# Altium PCB Controller R2.PcbDoc (part 3 of 3)
Units mil, origin at the board's own origin, x right, y up, seen from the top; angles counter-clockwise.
Board outline 3149.61 x 3149.61 mil, 4 copper layers (Top Layer, Inner 1, Inner 2, Bottom Layer), stack 70.112 mil thick; 128 components, 120 nets, 594 pads, 1557 vias.
Unrouted connection lines stored in the file: 130.
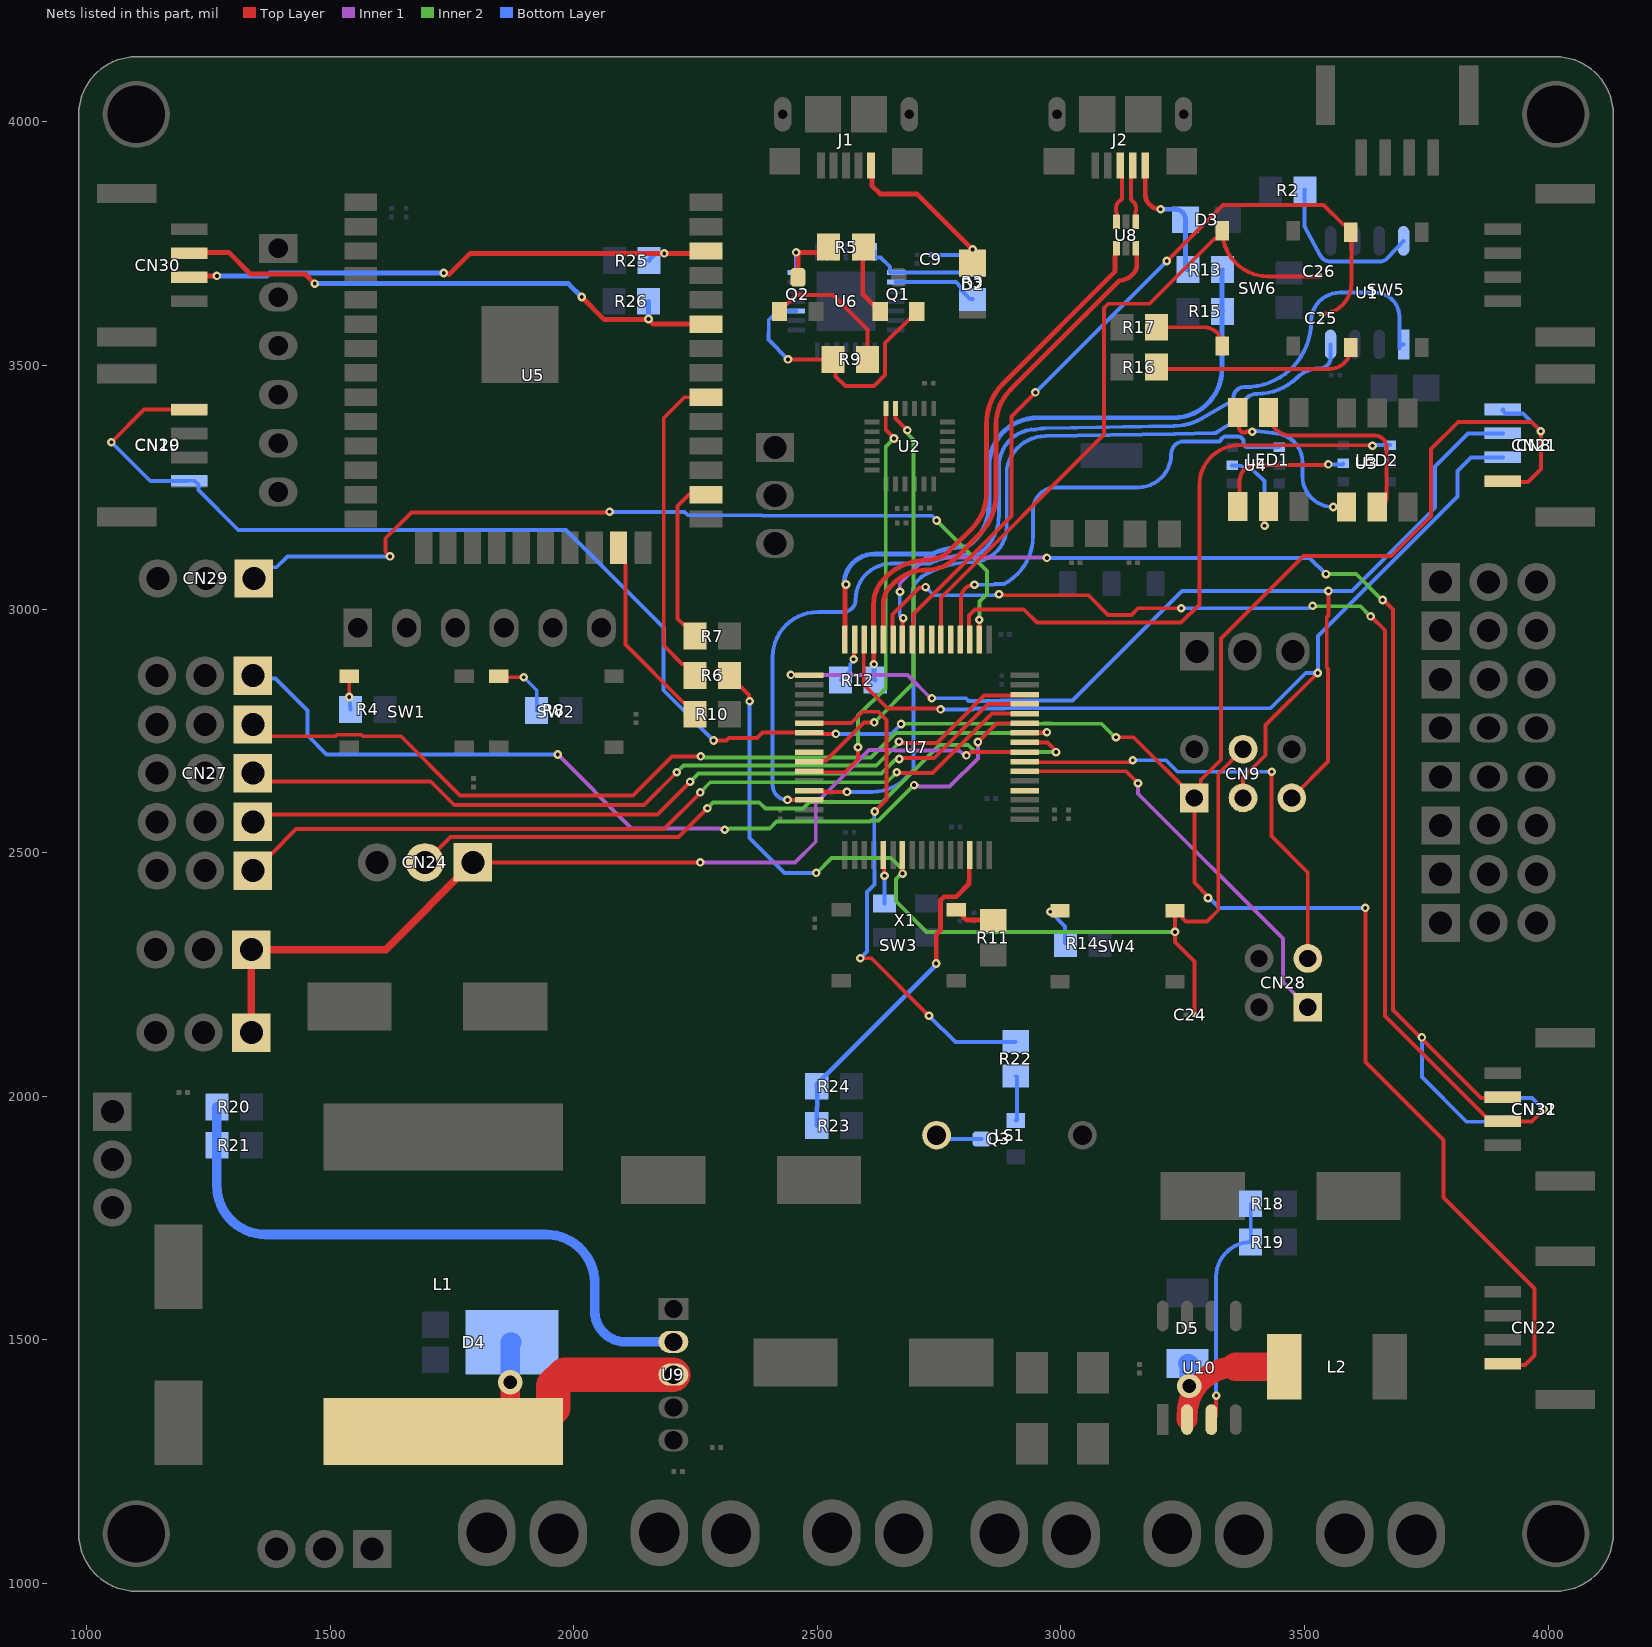
[diagram p5: the nets of this part, all layers, seen from the top]

## Via types
v1: diameter 17.72/17.72/17.72/17.72 (per signal layer), hole 7.87, Top Layer to Bottom Layer, tented both sides, 1234 vias
v2: diameter 17.72, hole 7.87, Top Layer to Bottom Layer, tented both sides, 176 vias
v3: diameter 10.87, hole 7.87, Top Layer to Bottom Layer, 138 vias
v4: diameter 10.87, hole 7.87, Top Layer to Bottom Layer, tented both sides, 6 vias
v5: diameter 50, hole 28, Top Layer to Bottom Layer, tented both sides, 2 vias
v6: diameter 78.74, hole 39.37, Top Layer to Bottom Layer, tented both sides, 1 vias

## Nets (pads, with @x,y where several pads share a name; then routed paths per layer and width w, separated by ;. In a path a pad name is that pad's centre, name@x,y a point inside that pad or via, vN(x,y) a via of type N, cw(c..) or ccw(c..) an arc to the next point about the centre after c; other vN are vias at no path point) (continued)
NetCN24_1: CN24.1 pad.1@1338.58,2130.91 pad.1@1338.58,2301.18 U7.24 | length 1980.4
  Top Layer w8: CN24.1@1793.31,2480.32 v2(2259.84,2480.32) ; v2(2806.1,2699.8) 2808.73,2699.8 2815.46,2706.54 U7.24@2925.72,2706.54
  Top Layer w15.75: pad.1@1338.58,2130.91 pad.1@1338.58,2301.18 1614.17,2301.18 CN24.1@1793.31,2480.32
  Inner 1 w8: v2(2259.84,2480.32) 2454.72,2480.32 2497.05,2522.64 2497.05,2601.38 2606.3,2710.63 2659.93,2710.63 2660.32,2710.23 2791.03,2710.23 2797.03,2704.23 2799.04,2704.23 2803.47,2699.8 v2(2806.1,2699.8)
NetCN24_2: CN24.2 U7.25 | length 1492.4
  Top Layer w8: CN24.2@1694.88,2480.32 1747.05,2532.48 2215.55,2532.48 v2(2274.61,2591.54) ; U7.25@2925.72,2726.54 2925.88,2726.38 2972.44,2726.38 2990.16,2708.66 v2(2990.16,2706.69)
  Inner 2 w8: CN24.2@1688.98,2478.35 1690.94,2480.32 CN24.2@1694.88,2480.32 ; v2(2274.61,2591.54) 2286.42,2603.35 2380.91,2603.35 2393.7,2590.55 2470.47,2590.55 2484.25,2604.33 2633.86,2604.33 2750.98,2721.46 2810.04,2721.46 2824.8,2706.69 v2(2990.16,2706.69)
NetCN27_1: CN27.1 U7.27 | length 1857.8
  Top Layer w8: v2(2829.73,2727.39) 2868.08,2765.75 2925.2,2765.75 2925.41,2765.54 U7.27@2925.72,2765.54
  Inner 1 w8: v2(1967.52,2701.77) 2119.09,2550.2 2300.49,2550.2 2301.67,2549.02 2308.18,2549.02 v2(2310.04,2547.17) ; v2(2698.82,2638.78) 2700.68,2636.92 2707.27,2636.92 2708.36,2635.83 2771.65,2635.83 2829.72,2693.9 v2@2829.72,2726.38 ; v2@2829.73,2726.38 v2(2829.73,2727.39)
  Inner 2 w8: v2(2310.04,2547.17) 2311.9,2549.02 2318.41,2549.02 2319.58,2550.2 2402.56,2550.2 2416.34,2563.98 2608.27,2563.98 2610.24,2565.94 2625.98,2565.94 v2(2698.82,2638.78)
  Bottom Layer w8: CN27.1@1341.54,2863.39 1347.08,2857.84 1388.22,2857.84 1453.74,2792.32 1453.74,2741.14 1493.11,2701.77 v2(1967.52,2701.77)
NetCN27_2: CN27.2 U7.26 | length 1794
  Top Layer w8: CN27.2@1341.54,2763.39 1342.91,2763.39 1367.13,2739.17 1511.57,2739.17 1514.71,2742.32 1564.03,2742.32 1567.17,2739.17 1645.67,2739.17 1766.92,2617.92 2121.86,2617.92 2201.77,2697.83 v2(2260.83,2697.83) ; U7.26@2925.72,2746.54 2926.07,2746.89 2971.11,2746.89 v2(2971.46,2747.24)
  Inner 2 w8: v2(2260.83,2697.83) 2262.69,2695.98 2269.56,2695.98 2269.67,2695.87 2610.24,2695.87 2660.43,2746.06 2970.28,2746.06 v2(2971.46,2747.24)
NetCN27_3: CN27.3 U7.30 | length 1708.9
  Top Layer w8: CN27.3@1341.54,2663.39 1344.49,2663.39 1361.22,2646.65 1706.69,2646.65 1754.92,2598.43 2144.69,2598.43 v2(2211.61,2665.35) ; v2(2667.72,2728.09) 2669.31,2728.09 2672.01,2725.39 2746.06,2725.39 2815.94,2795.28 2815.94,2796.26 2842.72,2823.04 2923.43,2823.04 2924.93,2824.54 U7.30@2925.72,2824.54
  Inner 2 w8: v2(2211.61,2665.35) 2225.39,2679.13 2621.06,2679.13 2667.72,2725.79 v2(2667.72,2728.09)
NetCN27_4: CN27.4 U7.29 | length 1684.5
  Top Layer w8: CN27.4@1341.54,2563.39 1356.89,2578.74 2172.24,2578.74 v2(2239.17,2645.67) ; v2(2668.31,2692.38) 2670.17,2694.24 2677.04,2694.24 2677.68,2694.88 2740.16,2694.88 2850.81,2805.54 U7.29@2925.72,2805.54
  Inner 2 w8: v2(2239.17,2645.67) 2255.91,2662.4 2631.89,2662.4 2660.01,2690.52 2666.45,2690.52 v2(2668.31,2692.38)
NetCN27_5: CN27.5 U7.28 | length 1722
  Top Layer w8: CN27.5@1341.54,2463.39 1345.28,2463.39 1347.44,2465.55 1347.44,2469.29 1376.91,2498.76 1380.65,2498.76 1430.37,2548.48 2185.29,2548.48 2258.86,2622.05 2258.86,2623.03 v2(2259.84,2624.02) ; v2(2663.39,2665.35) 2665.35,2663.39 2736.22,2663.39 2858.37,2785.54 U7.28@2925.72,2785.54
  Inner 2 w8: v2(2259.84,2624.02) 2280.51,2644.68 2642.72,2644.68 v2(2663.39,2665.35)
NetCN28_1: CN28.1 U7.22 | length 847
  Top Layer w8: U7.22@2925.72,2667.54 2943.68,2667.54 2943.9,2667.32 3133.86,2667.32 v2(3158.46,2642.72)
  Inner 1 w8: v2(3158.46,2642.72) 3158.46,2621.06 3455.71,2323.82 3455.71,2234.25 CN28.1@3506.89,2183.07
NetCN28_3: CN28.3 U7.23 | length 940.7
  Top Layer w8: U7.23@2925.72,2686.54 2926.43,2685.83 3140.88,2685.83 3145.01,2689.96 v2(3147.64,2689.96) ; v2(3433.07,2666.34) 3437.99,2666.34 3432.09,2660.43 3432.09,2534.45 3506.89,2459.65 CN28.3@3506.89,2283.07
  Bottom Layer w8: v2(3147.64,2689.96) 3215.55,2689.96 3239.17,2666.34 v2(3433.07,2666.34)
NetCN29_1: CN29.1 U7.34 | length 1807.2
  Top Layer w8: v2(1623.11,3108.27) 1623.11,3108.88 1614.17,3117.81 1614.17,3145.67 1667.32,3198.82 2072.83,3198.82 v2(2073.82,3199.8) ; U7.34@2832.7,2937.56 v2(2832.68,2978.35)
  Inner 2 w8: v2(2745.08,3182.09) 2848.43,3078.74 2848.43,3031.5 2832.68,3015.75 v2(2832.68,2978.35)
  Bottom Layer w8: CN29.1@1343.5,3062.99 1351.38,3062.99 1359.25,3055.12 1359.25,3066.43 1378.87,3086.05 1390.19,3086.05 1412.4,3108.27 v2(1623.11,3108.27) ; v2(2073.82,3199.8) 2227.36,3199.8 2234.44,3192.72 2385.36,3192.72 2386.34,3191.74 2735.43,3191.74 v2(2745.08,3182.09)
NetCN30_2: CN30.2 R26.1 U5.33 | length 1159.2
  Top Layer w9.84: CN30.2@1210.67,3730.32 1216.54,3730.32 1218.5,3732.28 1292.32,3732.28 1336.61,3687.99 1448.82,3687.99 v2(1468.5,3668.31) ; v2(2016.73,3640.75) 2062.99,3594.49 2153.54,3594.49 2162.99,3585.04 U5.33@2271.65,3585.04
  Bottom Layer w9.84: v2(1468.5,3668.31) 1989.17,3668.31 v2(2016.73,3640.75) ; v2(2153.54,3595.47) R26.1@2153.54,3631.89
NetCN30_3: CN30.3 R25.1 U5.36 | length 1123.9
  Top Layer w9.84: CN30.3@1210.67,3681.1 1213.62,3684.06 v2(1267.72,3684.06) ; v2(1733.27,3690.09) 1734.77,3688.58 1742.93,3688.58 1744.3,3687.21 1787.4,3730.32 v2(2186.02,3730.32) 2266.93,3730.32 U5.36@2271.65,3735.04
  Bottom Layer w9.84: v2(1267.72,3684.06) 1370.67,3684.06 1376.7,3690.09 v2(1733.27,3690.09) ; R25.1@2154.53,3715.55 2154.53,3716.54 2168.31,3730.32 v2(2186.02,3730.32)
NetCN31_2: CN31.2 CN32.2 U7.43 | length 2452.5
  Top Layer w8: U7.43@2655.72,2937.54 2654.53,2938.73 2654.53,2989.17 2709.79,3044.43 2721.6,3044.43 v2(2722.44,3045.28) ; v2(2873.03,3030.59) 2874.89,3028.73 2881.76,3028.73 2881.95,3028.54 3056.57,3028.54 3096.68,2988.44 3144.94,2988.44 3158.46,3001.97 v2(3247.05,3001.97) ; v2(3635.83,2985.24) 3636.81,2985.24 3665.35,2956.69 3665.35,2165.32 3874.04,1956.63 3881.85,1948.82 3966.54,1948.82 v2(3991.14,1973.43)
  Inner 2 w8: v2(3516.73,3006.89) 3517.72,3005.91 3615.16,3005.91 v2(3635.83,2985.24)
  Bottom Layer w8: v2(2722.44,3045.28) 2739.17,3028.54 2873.03,3028.54 v2(2873.03,3030.59) ; v2(3247.05,3001.97) 3509.18,3001.97 3514.1,3006.89 v2(3516.73,3006.89) ; CN31.2@3907.44,1998.03 3907.44,1997.09 3907.48,1997.05 3967.52,1997.05 v2(3991.14,1973.43)
NetCN31_3: CN31.3 CN32.3 U7.42 | length 2608.2
  Top Layer w8: U7.42@2674.72,2937.54 2674.73,2979.87 v2(2676.58,2981.73) ; v2(3660.43,3018.7) 3662.4,3018.7 3682.09,2999.02 3682.09,2177.17 3862.2,1997.05 3903.54,1997.05 3904.53,1998.03 CN32.3@3907.44,1998.03
  Inner 1 w8: v2(2669.93,3035.78) 2669.29,3036.42 2669.29,3052.17 2723.43,3106.3 2969.49,3106.3 2970.47,3105.32 v2(2971.46,3105.32)
  Inner 2 w8: v2(3544.29,3071.85) 3606.3,3071.85 3659.45,3018.7 v2(3660.43,3018.7)
  Bottom Layer w8: v2(2669.93,3035.78) 2669.93,3035.09 2669.29,3034.45 2669.29,2987.26 2674.83,2981.73 v2(2676.58,2981.73) ; v2(2971.46,3105.32) 3510.83,3105.32 v2(3544.29,3071.85) ; v2(3741.14,2121.06) 3741.14,2039.37 3832.68,1947.83 3906.5,1947.83 CN31.3@3907.44,1948.82
NetCN33_1: U7.20
NetCN33_2: U7.37
NetCN33_3: U7.39
NetCN33_4: U7.40
NetCN33_5: U7.57
NetD4_3: D4.3 L1.1 U9.3 | length 573.8
  Top Layer w39.37: v5(1870.08,1413.39) 1870.08,1351.07 L1.1@1909.14,1312.01
  Top Layer w70.87: L1.1@1909.14,1312.01 1958.35,1361.22 1958.35,1405.68 1981.41,1428.74 U9.3@2204.72,1428.74
  Bottom Layer w39.37: v5(1870.08,1413.39) 1870.08,1496.06 1870.87,1495.28 D4.3@1873.31,1495.28
NetD5_K: D5.K L2.1 U10.2 | length 313.8
  Top Layer w43.31: U10.2@3259.06,1336.61 3259.06,1344.88 cw(c3359.06,1344.88) 3359.06,1444.88
  Top Layer w59.06: 3359.06,1444.88 L2.1@3458.66,1444.88
  Bottom Layer w39.37: D5.K@3259.84,1451.61 3260.98,1451.61 cw(c3260.98,1448.82) 3263.78,1448.82 v5(3263.78,1405.51)
NetLED1_1: LED1.1 U3.5 | length 288.2
  Top Layer w8: LED1.1@3363.19,3210.63 ccw(c3363.19,3214.57) 3367.13,3214.57 3367.13,3263.78 cw(c3398.62,3263.78) 3398.62,3295.28 3399.61,3295.28 ccw(c3399.61,3296.26) 3400.59,3296.26 3547.24,3296.26 ccw(c3547.24,3297.24) 3548.23,3297.24 v2(3549.21,3297.24)
  Bottom Layer w8: v2(3549.21,3297.24) 3577.76,3297.24 ccw(c3577.76,3299.21) U3.5@3579.72,3299.21
NetLED1_2: LED1.2 U4.5 | length 219.3
  Top Layer w8: v2(3418.31,3171.26) 3418.31,3202.76 cw(c3426.18,3202.76) LED1.2@3426.18,3210.63 cw(c3426.18,3213.58) 3423.23,3213.58 LED1.2@3423.23,3215.55
  Bottom Layer w8: U4.5@3351.38,3295.28 3351.75,3295.28 3351.81,3295.28 cw(c3351.81,3203.98) 3394.98,3284.42 3415.83,3265.41 3418.31,3262.93 v2(3418.31,3171.26)
NetLED1_5: LED1.5 LED2.2 | length 416.3
  Top Layer w8: LED1.5@3426.18,3403.54 ccw(c3473.43,3403.54) 3473.43,3356.3 3644.68,3356.3 cw(c3644.68,3332.68) 3668.31,3332.68 3668.31,3228.35 cw(c3649.61,3228.35) LED2.2@3649.61,3209.65
NetLED1_6: LED1.6 LED2.1 | length 361.3
  Top Layer w8: LED1.6@3363.19,3403.54 3364.17,3403.54 cw(c3364.17,3402.56) 3365.16,3402.56 3365.16,3375 ccw(c3378.94,3375) 3371.08,3363.68 ccw(c3375.64,3370.25) 3381.31,3364.61 3392.38,3364.61 v2(3392.8,3364.19) ; v2(3559.06,3209.65) LED2.1@3586.61,3209.65
  Bottom Layer w8: v2(3392.8,3364.19) 3393.09,3364.49 3393.09,3366.55 3435.05,3361.28 ccw(c3436.02,3369.22) 3436.02,3361.22 cw(c3436.02,3301.18) 3496.06,3301.18 3496.06,3272.64 ccw(c3559.06,3272.64) v2(3559.06,3209.65)
NetLS1_K: LS1.K Q3.3 | length 97
  Bottom Layer w8: LS1.K@2745.08,1920.28 ccw(c2752.95,1920.28) 2752.95,1912.4 Q3.3@2837.6,1912.4
NetQ1_1: Q1.1 R5.2 | length 149.2
  Top Layer w9.84: R5.2@2594.49,3743.11 2593.5,3742.13 2593.5,3646.92 2615.11,3625.32 2618.46,3625.32 2629.32,3614.45 Q1.1@2629.32,3611.1
NetQ1_2: Q1.2 R9.1 U6.24 | length 566.4
  Top Layer w8: v2(2439.96,3512.8) R9.1@2532.48,3512.8 ; R9.1@2537.83,3511.39 2537.83,3477.92 2557.71,3458.04 2616.74,3458.04 2638.97,3480.27 2638.97,3545.95 2688.99,3595.97 2692.34,3595.97 2704.13,3607.76 Q1.2@2704.13,3611.1
  Bottom Layer w8: v2(2439.96,3512.8) 2399.61,3553.15 2399.61,3565.94 2400.59,3566.93 2400.59,3593.5 2419.29,3612.2 U6.24@2457.09,3612.2
NetQ2_1: Q2.1 R9.2 | length 287
  Top Layer w8: Q2.1@2422.63,3611.1 2422.63,3614.45 2434.42,3626.24 2437.76,3626.24 2456.21,3644.68 2532.48,3644.68 2603.35,3573.82 R9.2@2603.35,3512.8
NetQ2_3: Q2.3 R5.1 U6.28 | length 165.7
  Top Layer w9.84: Q2.3@2460.63,3681.1 2460.63,3726.22 2456.69,3730.15 v2(2456.69,3732.28) 2512.8,3732.28 R5.1@2523.62,3743.11
  Bottom Layer w9.84: v2(2456.69,3732.28) 2457.09,3731.89 U6.28@2457.09,3690.94
NetQ3_1: Q3.1 R22.1 | length 94.2
  Bottom Layer w8: R22.1@2907.48,2041.34 cw(c2907.48,2038.39) 2910.43,2038.39 2910.43,1953.24 cw(c2907.6,1953.24) Q3.1@2907.6,1950.4
NetR2_2: R2.2 U1.8 | length 338
  Bottom Layer w8: R2.2@3500.98,3860.24 cw(c3500.98,3861.22) 3500,3861.22 3500,3860.24 3500,3787.99 ccw(c3508,3787.99) 3500.97,3784.18 3532.61,3725.85 ccw(c3553.54,3737.2) 3553.54,3713.39 3653.54,3713.39 ccw(c3653.54,3737.2) 3670.96,3720.96 U1.8@3703.54,3755.91
NetR3_2: R3.2 U6.9 | length 176
  Bottom Layer w8: U6.9@2661.02,3671.26 2784.45,3671.26 2795.34,3660.37 2795.34,3655.45 2813.98,3636.81 2818.9,3636.81 R3.2@2818.9,3635.83
NetR4_2: R4.2 SW1.1 | length 68.1
  Top Layer w8: v2(1539.37,2819.69) SW1.1@1539.37,2862.2
  Bottom Layer w8: v2(1539.37,2819.69) R4.2@1542.32,2794.29
NetR6_1: R6.1 U5.30 | length 665
  Top Layer w8: R6.1@2249.02,2864.17 2246.06,2864.17 2242.13,2868.11 2242.13,2875 2229.39,2887.73 2222.5,2887.73 2185.04,2925.2 2185.04,3392.72 2227.36,3435.04 U5.30@2271.65,3435.04
NetR7_1: R7.1 U5.26 | length 351.5
  Top Layer w8: R7.1@2249.02,2944.88 2249.02,2948.82 2229.39,2968.44 2225.46,2968.44 2213.58,2980.32 2213.58,3211.61 2237.01,3235.04 U5.26@2271.65,3235.04
NetR8_2: R8.2 SW2.1 | length 130.9
  Top Layer w8: SW2.1@1846.46,2862.2 1858.27,2862.2 1860.24,2860.24 v2(1897.64,2860.24)
  Bottom Layer w8: v2(1897.64,2860.24) 1924.21,2833.66 R8.2@1924.21,2792.32
NetR10_1: R10.1 U5.23 | length 408.7
  Top Layer w8: U5.23@2092.32,3125.98 2106.04,3112.27 2106.04,3092.09 2106.3,3091.83 2106.3,2927.17 2225.46,2808.01 2229.39,2808.01 2249.02,2788.39 R10.1@2249.02,2784.45
NetR11_2: R11.2 SW3.3 | length 88.8
  Top Layer w9.84: SW3.3@2785.43,2382.87 2791.34,2382.87 2800.2,2374.02 2800.2,2368.11 2806.1,2362.2 2861.22,2362.2 R11.2@2861.22,2361.22
NetR12_1: R12.1 U7.47 | length 95
  Top Layer w8: v2(2574.61,2897.1) 2575.67,2898.16 2575.67,2936.48 U7.47@2576.72,2937.54
  Bottom Layer w8: R12.1@2548.23,2854.33 2567.85,2873.95 2567.85,2887.71 2574.61,2894.47 v2(2574.61,2897.1)
NetR14_2: R14.2 SW4.1 | length 101.1
  Top Layer w8: v2(2978.35,2378.94) SW4.1@2998.03,2378.94 ; SW4.1@2998.03,2380.91 SW4.1@2998.03,2378.94 ; SW4.1@2999.02,2377.95 SW4.1@2998.03,2378.94
  Bottom Layer w8: v2(2978.35,2378.94) 3008.43,2348.85 3008.43,2315.38 R14.2@3009.84,2313.98
NetR16_2: R16.2 SW5.1 | length 420
  Top Layer w8: R16.2@3200.79,3493.11 3551.18,3493.11 ccw(c3551.18,3537.4) SW5.1@3595.47,3537.4
NetR17_2: R17.2 SW6.1 | length 156.8
  Top Layer w8: R17.2@3196.85,3578.74 3293.31,3578.74 cw(c3293.31,3540.35) SW6.1@3331.69,3540.35
NetR18_1: R18.1 R19.1 U10.3 | length 489
  Top Layer w8: U10.3@3309.06,1336.61 ccw(c3309.06,1346.46) 3318.9,1346.46 v2(3318.9,1385.83)
  Bottom Layer w8: v2(3318.9,1385.83) 3318.9,1629.92 cw(c3389.76,1629.92) R19.1@3389.76,1700.79 R18.1@3389.76,1779.53
NetR20_1: R20.1 R21.2 U9.2 | length 1306.4
  Bottom Layer w19.68: R20.1@1267.72,1978.35 1267.72,1972.44 R21.2@1267.72,1899.61 1267.72,1816.54 ccw(c1367.72,1816.54) 1367.72,1716.54 1943.31,1716.54 cw(c1943.31,1616.54) 2043.31,1616.54 2043.31,1559.06 ccw(c2106.3,1559.06) 2106.3,1496.06 U9.2@2204.72,1496.06
NetR22_2: R22.2 U7.54 | length 1078
  Top Layer w8: U7.54@2483.72,2765.54 2484.92,2766.73 2569.88,2766.73 2592.52,2789.37 2625.98,2789.37 2642.53,2772.83 2642.53,2609.06 v2(2618.11,2584.65) ; v2(2588.58,2283.46) 2611.22,2283.46 v2(2729.33,2165.35)
  Bottom Layer w8: v2(2588.58,2283.46) 2602.17,2297.06 2602.17,2419.34 2617.32,2434.48 2617.32,2464.35 2617.13,2464.54 2617.13,2583.66 v2(2618.11,2584.65) ; v2(2729.33,2165.35) 2783.46,2111.22 2903.54,2111.22 2904.53,2112.2 R22.2@2907.48,2112.2
NetR23_2: R23.2 R24.1 U7.14 | length 700.7
  Top Layer w9.84: v2(2744.09,2272.64) 2744.09,2331.94 2752.83,2340.67 2752.83,2402.01 2760.4,2409.57 2784.88,2409.57 2811.51,2436.2 2811.51,2442.05 2812.15,2442.69 2812.15,2494.96 U7.14@2812.72,2495.54
  Bottom Layer w9.84: R23.2@2499.02,1939.96 2499.16,1940.1 2499.16,1976.52 2500,1977.36 2500,2019.68 R24.1@2499.02,2020.67 2499.02,2024.61 2742.59,2268.18 2742.59,2271.13 v2(2744.09,2272.64)
NetU1_1: U1.1 U7.62 | length 2197.2
  Top Layer w8: v2(2438.98,2608.46) v2(2438.98,2608.46) U7.62@2483.72,2608.54 U7.62@2483.72,2608.54
  Bottom Layer w8: v2(2438.98,2608.46) 2438.98,2608.27 cw(c2438.98,2638.78) 2408.46,2638.78 2408.46,2901.57 cw(c2500.98,2901.57) 2500.98,2994.09 2553.15,2994.09 ccw(c2553.15,3019.68) 2578.74,3019.68 cw(c2652.56,3019.68) 2652.56,3093.5 2730.39,3093.5 cw(c2815.82,2908.64) 2815.86,3112.29 ccw(c2815.78,3169.54) 2834.98,3115.61 ccw(c2832.31,3123.15) 2837.43,3117 ccw(c2773.03,3193.5) 2873.03,3193.5 2873.03,3293.31 cw(c2948.82,3293.31) 2947.5,3369.08 2947.57,3369.08 ccw(c2947.44,3377.08) 2949.08,3369.25 2949.14,3369.27 cw(c2968.98,3274.22) 2960.56,3370.95 cw(c2968.98,3274.22) 2967.45,3371.3 3232.7,3375.81 ccw(c3230.71,3492.72) 3289.61,3391.72 3350.36,3427.14 ccw(c3346.33,3434.06) 3354.33,3434.06 cw(c3375.98,3434.06) 3375.98,3455.71 3378.94,3455.71 ccw(c3378.94,3590.55) 3388.81,3456.07 ; 3388.85,3456.07 ccw(c3388.29,3464.05) 3390.45,3456.35 cw(c3402.59,3411.42) 3402.66,3457.96 3402.81,3457.96 3403.52,3457.97 ccw(c3378.94,3590.55) 3513.78,3590.55 cw(c3572.83,3590.55) 3572.83,3649.61 3645.67,3649.61 cw(c3645.67,3600.39) 3694.88,3600.39 3694.88,3534.65 cw(c3703.54,3534.65) U1.1@3703.54,3543.31
NetU1_4: U1.4 U7.61 | length 1763.3
  Top Layer w8: U7.61@2483.72,2627.54 ccw(c2488.39,2634.04) 2488.39,2626.04 2512.72,2626.04 cw(c2512.72,2614.04) 2516.54,2625.41 ccw(c2519.08,2633) 2519.08,2625 v2(2561.02,2625)
  Bottom Layer w8: v2(2561.02,2625) 2612.65,2625 2612.7,2625 ccw(c2612.7,2725) 2672.03,2644.5 2697.44,2669.91 2697.44,3032.46 2695.87,3034.04 cw(c2733.29,3034.04) 2701.58,3053.92 2702.26,3054.59 2713.2,3065.53 2713.8,3066.13 cw(c2815.82,2908.64) 2815.86,3096.29 ccw(c2815.78,3169.54) 2889.03,3169.54 2889.03,3274.61 2889.03,3287.79 cw(c2968.98,3274.22) 2968.98,3355.32 ccw(c2968.98,3363.32) 2969.12,3355.32 3233.14,3359.82 ccw(c3230.71,3492.72) 3233.24,3359.82 3315.83,3361.44 ccw(c3315.67,3369.44) 3320.96,3363.44 cw(c3339.57,3342.52) 3324.81,3366.31 3351.52,3382.91 ccw(c3347.3,3389.7) 3353.6,3384.77 ; 3353.62,3384.8 3370.39,3406.63 ccw(c3364.05,3411.5) 3372.05,3411.46 cw(c3402.59,3411.42) 3402.39,3441.96 3402.68,3441.96 ccw(c3402.38,3561.07) 3484.7,3474.99 3484.77,3475.05 cw(c3530.84,3428.98) 3505.91,3489.17 cw(c3531.71,3426.88) 3531.71,3494.31 ccw(c3531.71,3516.14) 3553.54,3516.14 U1.4@3553.54,3543.31
NetU2_23: U2.23 U7.58 | length 861
  Top Layer w8: U7.58@2483.72,2686.54 2506.38,2686.54 2506.89,2686.02 2506.89,2686.2 2508.72,2688.04 2508.9,2688.04 2509.9,2689.04 2517.69,2689.04 2596.38,2767.72 v2(2617.13,2767.72) ; U2.23@2660.43,3412.2 2661.02,3411.62 2661.02,3391.15 v2(2685.04,3367.13)
  Inner 2 w8: v2(2617.13,2767.72) 2697.83,2848.43 2697.83,3347.74 2686.9,3358.68 2686.9,3365.27 v2(2685.04,3367.13)
NetU2_24: U2.24 U7.59 | length 869.6
  Top Layer w8: U7.59@2483.72,2667.54 2485.22,2666.04 2512.73,2666.04 2513.41,2665.35 2557.09,2665.35 2583.66,2691.93 v2(2583.66,2716.54) ; U2.24@2640.75,3412.2 2640.75,3368.11 2657.48,3351.38 v2(2657.48,3350.39)
  Inner 2 w8: v2(2583.66,2716.54) 2583.66,2781.5 2640.75,2838.58 2640.75,3333.66 v2(2657.48,3350.39)
NetU3_1: U3.1 U7.35 | length 1238
  Top Layer w8: U7.35@2812.72,2937.54 2811.82,2938.44 2811.82,2986.99 2824.04,2999.2 2923.98,2999.2 2950.75,2972.44 2957.68,2972.44 3184.45,2972.44 3247.02,2972.44 3284.45,3009.87 3284.45,3072.44 3284.45,3254.92 cw(c3366.14,3254.92) 3366.14,3336.61 cw(c3366.14,3328.61) 3366.19,3336.61 3636.53,3336.07 3637.17,3335.44 v2(3639.63,3335.44)
  Bottom Layer w8: v2(3639.63,3335.44) cw(c3643.8,3328.61) 3643.8,3336.61 U3.1@3676.18,3336.61
NetU4_1: U4.1 U7.36 | length 966.2
  Top Layer w8: U7.36@2793.72,2937.54 ccw(c2787.22,2942.2) 2795.22,2942.24 2795.22,2966.54 cw(c2807.22,2966.54) 2795.26,2967.39 ccw(c2787.28,2967.97) 2795.28,2968.01 2795.28,3022.64 cw(c2822.83,3022.64) v2(2822.83,3050.2)
  Bottom Layer w8: v2(2822.83,3050.2) 2863.14,3050.2 2864.39,3051.45 2882.78,3051.45 ccw(c2831.76,3150.2) 2942.91,3150.2 2942.91,3202.76 cw(c2990.16,3202.76) 2990.16,3250 3158.46,3250 ccw(c3158.46,3317.91) 3226.38,3317.91 cw(c3252.95,3317.91) 3247.81,3343.99 cw(c3249.33,3336.13) 3249.2,3344.13 3267.29,3344.49 cw(c3267.47,3336.49) 3267.47,3344.49 3324.59,3344.49 ccw(c3321.98,3352.05) 3329.02,3348.24 cw(c3339.57,3342.52) 3331.59,3351.49 cw(c3339.57,3342.52) 3339.57,3354.52 3363.19,3354.52 cw(c3363.19,3342.52) 3375.19,3342.52 3375.19,3340.68 ccw(c3383.19,3340.68) 3383.19,3332.68 U4.1@3447.83,3332.68
NO_ESD_N: J2.2 U8.4 | length 120.2
  Top Layer w7.99: J2.2@3147.64,3910.43 ccw(c3156.81,3901.26) 3143.84,3901.26 3143.84,3844.38 ccw(c3151.83,3844.41) 3146.85,3838.16 cw(c3133.86,3821.85) 3153.26,3829.5 cw(c3133.86,3821.85) 3153.66,3815.31 ccw(c3161.25,3812.81) 3153.26,3812.81 3153.26,3795.17 U8.4@3153.54,3794.88
NO_ESD_P: J2.3 U8.6 | length 121.3
  Top Layer w7.99: U8.6@3114.17,3794.88 ccw(c3106.98,3798.36) 3114.97,3798.4 3114.97,3809.09 cw(c3127.52,3809.09) 3115.03,3810.33 ccw(c3107.08,3811.12) 3114.5,3814.1 cw(c3133.86,3821.85) 3115.14,3831.05 cw(c3133.86,3821.85) 3122.29,3839.2 ccw(c3117.85,3845.85) 3125.85,3845.89 3125.85,3901.26 ccw(c3112.88,3901.26) J2.3@3122.05,3910.43
nRST: C24.2 CN9.5 R6.2 SW4.2 U7.7 | length 2119.3
  Top Layer w8: R6.2@2319.88,2864.17 2319.88,2860.24 2339.5,2840.61 2343.44,2840.61 2360.24,2823.82 2360.24,2812.01 v2(2361.22,2811.02) ; U7.7@2674.72,2495.54 2674.72,2494.57 2675.2,2494.09 2674.68,2493.58 2674.68,2458.2 2675.22,2457.65 v2(2675.22,2457.14) ; SW4.2@3234.25,2380.91 v2(3234.25,2337.6) 3234.25,2316.93 3274.61,2276.57 C24.2@3274.61,2167.32 ; SW4.2@3239.17,2381.89 3249.94,2371.13 3249.94,2366.2 3256.89,2359.25 3300.2,2359.25 3323.02,2382.08 3323.02,2661.61 CN9.5@3374.02,2712.6
  Inner 2 w8: v2(2498.03,2458.66) 2499.02,2458.66 2529.53,2489.17 2651.57,2489.17 2673.37,2467.38 2673.37,2459 v2(2675.22,2457.14) 2672.69,2457.14 2661.42,2445.87 2661.42,2400.59 2724.41,2337.6 v2(3234.25,2337.6)
  Bottom Layer w8: v2(2361.22,2811.02) 2361.22,2530.51 2433.07,2458.66 v2(2498.03,2458.66) ; CN9.5@3373.03,2710.63 3374.02,2711.61 CN9.5@3374.02,2712.6
RCC_OSC_IN: U7.5 X1.3 | length 101
  Top Layer w8: U7.5@2635.72,2495.54 2636.95,2494.31 2636.95,2453.98 v2(2638.17,2452.76)
  Bottom Layer w8: X1.3@2637.8,2395.67 2638.17,2396.05 v2(2638.17,2452.76)
SWCLK: CN8.2 CN9.3 U7.49 | length 2258.2
  Top Layer w8: v2(2445.87,2865.16) 2446.18,2864.85 2483.41,2864.85 U7.49@2483.72,2864.54 ; CN9.3@3474.02,2612.6 3474.02,2612.8 3548.23,2687.01 3548.23,2877.73 3545.82,2880.14 3545.82,2983.55 3549.21,2986.95 v2(3549.21,3037.4)
  Inner 1 w8: v2(2445.87,2865.16) 2685.04,2865.16 2733.08,2817.12 v2(2735.24,2817.12)
  Bottom Layer w8: v2(2735.24,2817.12) 2805.12,2817.12 2810.48,2811.76 2877.73,2811.76 2878.53,2812.55 3024.17,2812.55 3249.02,3037.4 v2(3549.21,3037.4) 3597.45,3037.4 3768.21,3208.16 3768.21,3292.82 3836.02,3360.63 CN8.2@3907.44,3360.63 ; CN9.3@3474.02,2612.6 3474.02,2611.61 CN9.3@3474.41,2611.22
SWDIO: CN8.3 CN9.2 U7.46 | length 2036.3
  Top Layer w8: U7.46@2596.72,2937.54 2595.47,2936.28 2595.47,2845.47 2644.68,2796.26 2751.35,2796.26 v2(2753.25,2794.36) ; CN9.2@3374.02,2612.6 3374.27,2612.85 3374.27,2654.13 3420.28,2700.13 3420.28,2762 v2(3527.37,2869.09)
  Bottom Layer w8: v2(2753.25,2794.36) 2819.96,2794.36 2821.36,2795.76 2884.36,2795.76 2885.15,2796.55 3430.15,2796.55 3502.7,2869.09 v2(3527.37,2869.09) 3527.75,2869.47 3527.75,2945.07 3813.98,3231.3 3813.98,3283.46 3841.93,3311.42 CN8.3@3907.44,3311.42 ; CN9.2@3374.02,2612.6 CN9.2@3374.02,2614.17
SWO: CN8.1 CN9.1 CN19.1 CN20.1 CN21.1 CN22.1 U7.55 | length 6065.3
  Top Layer w8: v2(1051.18,3342.52) 1118.28,3409.61 CN19.1@1210.67,3409.61 ; v2(2287.4,2730.32) 2314.01,2730.32 2319.12,2735.43 2376.17,2735.43 2387.98,2747.24 2483.02,2747.24 U7.55@2483.72,2746.54 2485.22,2745.04 2512.47,2745.04 2513.41,2744.09 v2(2538.39,2744.09) ; v2(3113.19,2737.2) 3149.41,2737.2 CN9.1@3274.02,2612.6 ; v2(3302.17,2407.29) 3302.17,2410.43 3274.02,2438.58 CN9.1@3274.02,2612.6 ; v2(3625,2386.81) 3625,2070.87 3785.43,1910.43 3785.43,1792.32 3972.44,1605.32 3972.44,1468.5 3952.76,1448.82 3909.93,1448.82 CN22.1@3907.43,1451.32 ; CN21.1@3907.44,3262.34 3907.02,3262.34 3905.51,3260.83 3958.66,3260.83 3985.24,3287.4 v2(3985.24,3365.16) 3965.82,3384.57 3815.68,3384.57 3759.84,3328.74 3759.84,3190.71 3737.25,3168.12 3737.02,3168.12 3678.15,3109.25 3498.03,3109.25 3328.74,2939.96 3328.74,2690.95 3287.23,2649.44 3287.23,2627.79 3274.02,2614.57 CN9.1@3274.02,2612.6
  Inner 2 w8: v2(2672.24,2764.2) 2672.8,2764.76 2963.73,2764.76 2964.06,2765.09 2978.85,2765.09 2979.18,2764.76 3083.66,2764.76 3111.22,2737.2 v2(3113.19,2737.2)
  Bottom Layer w8: v2(1051.18,3342.52) 1130.91,3262.8 1205.71,3262.8 1206.53,3263.61 CN20.1@1210.68,3263.61 1221.99,3263.61 1229.8,3255.8 1229.8,3244.49 1311.7,3162.59 1984.06,3162.59 2184.06,2962.6 2184.06,2833.66 v2(2287.4,2730.32) ; v2(2538.39,2744.09) 2652.56,2744.09 2672.24,2763.78 v2(2672.24,2764.2) ; CN9.1@3274.02,2612.6 3275,2612.6 CN9.1@3277.56,2615.16 ; v2(3302.17,2407.29) 3304.79,2407.29 3309.65,2402.43 3310.17,2402.43 3325.79,2386.81 v2(3625,2386.81) ; CN8.1@3907.44,3409.84 3907.44,3409.41 3906.5,3408.46 3912.93,3402.03 3948.36,3402.03 v2(3985.24,3365.16)
USB_DETECT: R13.1 R15.2 U7.48 | length 1386.6
  Top Layer w9.84: U7.48@2556.72,2937.54 2556.72,3046.3 2559.06,3048.63 v2(2559.06,3050.77)
  Bottom Layer w9.84: v2(2559.06,3050.77) 2555.53,3050.77 2555.12,3051.18 cw(c2617.13,3051.18) 2617.13,3113.19 2733.29,3113.19 cw(c2815.82,2908.64) 2805.52,3128.97 ccw(c2805.07,3138.8) 2810.66,3130.71 ccw(c2754.92,3210.63) 2852.36,3210.63 2852.36,3292.72 cw(c2952.36,3292.72) 2952.36,3392.72 3230.71,3392.72 ccw(c3230.71,3492.72) 3330.71,3492.72 3330.71,3611.22 R15.2@3330.71,3612.2 ; R15.2@3331.69,3611.22 cw(c3331.69,3612.2) R15.2@3330.71,3612.2 ; R13.1@3331.69,3696.85 3330.71,3696.85 R15.2@3330.71,3612.2
USB_N: U7.44 U8.3 | length 1049.3
  Top Layer w9.84: U7.44@2635.72,2937.54 2635.65,2937.61 2635.65,3011.16 cw(c2686.67,3011.16) 2650.59,3047.24 2655.95,3052.6 cw(c2723.43,2985.12) 2723.43,3080.55 2723.49,3080.55 ccw(c2723.49,3169.14) 2786.13,3106.5 2832.06,3152.42 ccw(c2747.39,3237.08) 2867.13,3237.08 2867.13,3379.34 cw(c2967.13,3379.34) 2896.42,3450.05 3052.42,3606.05 3118.06,3671.69 3120.35,3673.98 ccw(c3115.04,3719.18) 3151.53,3691.97 ccw(c3134.07,3704.99) 3155.79,3706.64 3155.79,3735.14 ccw(c3148.13,3735.14) U8.3@3153.67,3740.42
USB_P: R12.2 U7.45 U8.1 | length 1118
  Top Layer w9.84: v2(2616.33,2886.81) 2616.03,2887.11 2616.03,2937.23 U7.45@2615.72,2937.54 2615.8,2937.61 2615.8,3011.28 cw(c2686.38,3011.28) 2636.48,3061.19 2641.95,3066.66 cw(c2723.38,2985.23) 2723.38,3100.39 ; 2723.43,3100.39 ccw(c2723.43,3169.3) 2772.15,3120.58 2817.99,3166.42 ccw(c2747.28,3237.13) 2847.28,3237.13 2847.28,3379.38 cw(c2967.02,3379.38) 2882.35,3464.05 3111.09,3692.79 3111.09,3724.94 3112.2,3726.05 3112.2,3739.57 U8.1@3113.19,3740.55
  Bottom Layer w9.84: v2(2616.33,2886.81) 2616.33,2857.09 R12.2@2619.09,2854.33
USR_BTN1: C26.2 SW6.2 U7.38 | length 1390.8
  Top Layer w8: U7.38@2753.72,2937.54 2753.72,3023.41 3088.58,3358.27 3088.58,3618.28 3097.27,3626.97 3182.09,3626.97 3316.01,3760.89 3321.91,3760.89 3331.69,3770.67 SW6.2@3331.69,3776.57 ccw(c3425.2,3776.57) 3425.2,3683.07 3530.51,3683.07 3533.46,3683.07 ccw(c3531.5,3683.07) 3531.5,3685.04 C26.2@3530.51,3685.04
USR_BTN2: C25.2 SW5.2 U7.41 | length 1649.2
  Top Layer w8: U7.41@2694.72,2937.54 2696.22,2939.04 2696.22,2972.72 2697.44,2973.94 2697.44,2989.76 2898.62,3190.94 2898.62,3395.67 v2(2947.83,3444.88) ; v2(3217.52,3714.57) 3332.68,3829.72 3539.37,3829.72 3579.79,3789.31 3585.69,3789.31 3595.47,3779.53 SW5.2@3595.47,3773.62 cw(c3595.47,3772.64) 3596.46,3772.64 3596.46,3668.31 cw(c3534.45,3668.31) C25.2@3534.45,3606.3
  Bottom Layer w8: v2(2947.83,3444.88) v2(3217.52,3714.57)
VBUS_ESP: C9.2 D2.A J1.1 R3.1 U6.7 U6.8 | length 662.6
  Top Layer w9.84: J1.1@2610.24,3910.43 2612.2,3908.46 2612.2,3869.09 2628.94,3852.36 2704.72,3852.36 v2(2818.9,3738.19)
  Bottom Layer w8: U6.7@2618.11,3733.86 2618.11,3723.01 2619.11,3722.01 2629.95,3722.01 2649.18,3702.79 2649.18,3691.94 2650.18,3690.94 U6.8@2661.02,3690.94 2799.21,3690.94 R3.1@2814.96,3706.69 ; C9.2@2733.27,3727.36 2794.29,3727.36 R3.1@2814.96,3706.69 ; v2(2818.9,3738.19) R3.1@2818.9,3706.69 R3.1@2814.96,3706.69
VBUS_STM: D3.A J2.1 R13.2 | length 276.3
  Top Layer w9.84: J2.1@3173.23,3910.43 3173.23,3852.36 ccw(c3204.72,3852.36) v2(3204.72,3820.87)
  Bottom Layer w9.84: v2(3204.72,3820.87) 3234.25,3820.87 cw(c3234.25,3799.21) D3.A@3255.91,3799.21 3255.91,3701.77 ccw(c3260.83,3701.77) R13.2@3260.83,3696.85
pads on no net: CN1.5 CN2.5 CN3.5 CN4.5 CN8.5 CN9.4 CN19.5 CN20.5 CN21.5 CN22.5 CN30.5 CN31.5 CN32.5 J1.4 J2.4 LED2.5 LED2.6 SW3.2 U1.5 U2.2 U2.3 U2.4 U2.5 U2.6 U2.7 U2.12 U2.14 U2.15 U2.16 U2.17 U2.19 U2.21 U2.22 U5.17 U5.18 U5.19 U5.20 U5.21 U5.22 U5.24 U5.29 U5.31 U5.32 U5.37 U6.1 U6.2 U6.10 U6.11 U6.12 U6.13 U6.14 U6.15 U6.16 U6.17 U6.18 U6.19 U6.20 U6.21 U6.22 U6.23 U6.27 U6.29 U11.4

## Polygon pours and split planes (outlines as drawn)
GND on Top Layer "GND_L01_P010" (solid, pour order 10): 984.25,4133.86 984.25,984.25 4133.86,984.25 4133.86,4133.86
12V on Top Layer "12V_L01_P001" (solid, pour order 1): 1244.09,1294.29 2012.71,1294.29 ccw(c2012.71,1394.29) 2083.42,1323.58 2121.06,1361.22 2121.06,1560.94 cw(c2221.06,1560.94) 2150.35,1631.65 2410.43,1891.73 2575.79,1891.73 2839.81,1627.71 cw(c2769.09,1557) 2869.09,1557 2869.09,1294.29 3889.76,1294.29 3889.76,984.25 1244.09,984.25
no net on Top Layer "NONET_L01_P002" (solid, pour order 2): 992.28,1279.53
3V3 on Inner 1 "3V3_L02_P003" (solid, pour order 3): 984.25,4133.86 984.25,2165.35 4133.86,2165.35 4133.86,4133.86
12V on Inner 1 "12V_L02_P007" (solid, pour order 7): 984.25,1574.8 984.25,984.25 4133.86,984.25 4133.86,1574.8
5V on Inner 1 "5V_L02_P006" (solid, pour order 6): 984.25,2165.35 984.25,1574.8 4133.86,1574.8 4133.86,2165.35
3V3 on Inner 1 "3V3_L02_P004" (solid, pour order 4): 590.55,1870.08
GND on Inner 2 "GND_L03_P008" (solid, pour order 8): 984.25,4133.86 984.25,984.25 4133.86,984.25 4133.86,4133.86
GND on Bottom Layer "GND_L04_P009" (solid, pour order 9): 984.25,4133.86 984.25,984.25 4133.86,984.25 4133.86,4133.86

## Silkscreen, mask and mechanical layers (free items; w line width, h text height)
Top Overlay:
  circle w10: c1413.39,2368.11 r3.94
  lines w10: 998.03,1716.54 1106.3,1716.54 1106.3,2023.62 998.03,2023.62 998.03,1724.41 998.03,1716.54 ; 1086.61,2077.76 1393.7,2077.76 1393.7,2186.02 1393.7,2356.3 1094.49,2356.3 1086.61,2356.3 1086.61,2186.02 1086.61,2077.76 ; 1334.65,1017.72 1641.73,1017.72 1641.73,1125.98 1342.52,1125.98 1334.65,1125.98 1334.65,1017.72 ; 3224.41,2858.27 3224.41,2966.54 3531.5,2966.54 3531.5,2858.27 3523.62,2858.27 3224.41,2858.27
  text "CAN Bus" at 3581.79,3835.72 h32
  text "ESP32" at 2486.32,3824.9 h32
  text "STM32" at 3049.31,3824.9 h32
  text "OLED" at 1264.86,3762.7 h32 r270
  text "CAN Bus" at 3855.22,3588.68 h32 r90
  text "BTN1" at 3352.46,3471.55 h32
  text "BTN2" at 3619.19,3466.63 h32
  text "FL Motor" at 1267.81,3444.79 h32 r270
  text "JLCJLCJLCJLC" at 1706.79,3313.09 h32
  text "FR Motor" at 3853.25,3227.46 h32 r90
  text "V SW" at 1008.98,3151.45 h48 r270
  text "3V3" at 3336.71,2982.38 h32
  text "Analog Input" at 1017.09,2911.29 h45 r270
  text "nRST GND" at 3311.12,2776.67 h32
  text "ESP_EN" at 1557.18,2641.25 h32
  text "ESP_BOOT" at 1840.65,2641.25 h32
  text "SWO DIO CLK" at 3209.74,2514.86 h32
  text "PWM Output" at 4109.86,2488.32 h48 r90
  text "Servo" at 1004.09,2352.2 h60 r270
  text "BOOT0" at 2608.36,2160.53 h32
  text "nRST" at 3058.17,2160.53 h32
  text "Encoder" at 3614.08,2133.95 h32 r90
  text "Robot Controller R2 / Isaac W. / May 2020" at 1957.68,2016.73 h31
  text "I2C" at 3856.2,1923.32 h32 r90
  text "8V4" at 1121.16,1909.35 h32 r270
  text "BR Motor" at 3852.27,1410.53 h32 r90
  text "Power" at 2447.01,1198.98 h78.74
  text "Aux 12V" at 1387.89,1143.8 h32
Bottom Overlay:
  text "CAN Bus" at 3795.32,3835.5 h32
  text "CAN Bus" at 3854.24,3806.01 h32 r90
  text "SDW" at 3852.27,3379.83 h32 r90
  text "BL Motor" at 1269.78,3223.52 h32 r270
  text "I2C" at 3856.2,2004.83 h32 r90
  text "Robot Controller R2 / Isaac W. / May 2020" at 2252.95,2003.94 h38
Mechanical 1:
  lines w6: 984.25,4015.75 cw(c1102.36,4015.75) 1102.36,4133.86 ; 984.25,4015.75 984.25,4015.75 ; 984.25,4015.75 984.25,1102.36 ccw(c1102.36,1102.36) 1102.36,984.25 4015.75,984.25 ccw(c4015.75,1102.36) 4133.86,1102.36 4133.86,4015.75 ccw(c4015.75,4015.75) 4015.75,4133.86 4013.29,4133.86 1102.36,4133.86 ; 1102.36,4133.86 1102.36,4133.86

## Text inside footprints (layer, text, board x,y; h text height)
CN23: Top Overlay "1 2 3 4 5 6 7 8" at 3703.74,2343.11 h50.39 r90; Top Overlay "S" at 3807.91,2239.92 h60 r90; Top Overlay "+" at 3909.45,2243.86 h60 r90; Top Overlay "-" at 4006.21,2241.89 h60 r90
CN27: Top Overlay "S" at 1313.15,2979.37 h60 r270; Top Overlay "+" at 1211.62,2975.43 h60 r270; Top Overlay "-" at 1114.85,2977.4 h60 r270; Top Overlay "1 2 3 4 5" at 1417.32,2876.18 h50.39 r270
CN28: Top Overlay "A" at 3529.92,2087.6 h50 r90; Top Overlay "+" at 3429.53,2087.6 h50 r90; Top Overlay "-" at 3426.57,2346.46 h50 r90; Top Overlay "B" at 3525.98,2346.46 h50 r90
Designator2: Top Overlay "Y" at 2810.04,3363.19 h60; Top Overlay "X" at 2948.98,3229.49 h60
U9: Top Overlay "1" at 2193.9,1617.13 h32.01 r270